# Altium PCB AP2-Core.PcbDoc (part 2 of 3)
Units mm, origin at the board's own origin, x right, y up, seen from the top; angles counter-clockwise.
Board outline 50.2 x 44.2 mm, 4 copper layers (顶层, MidLayer1, MidLayer2, 底层); 65 components, 157 nets, 448 pads, 134 vias.
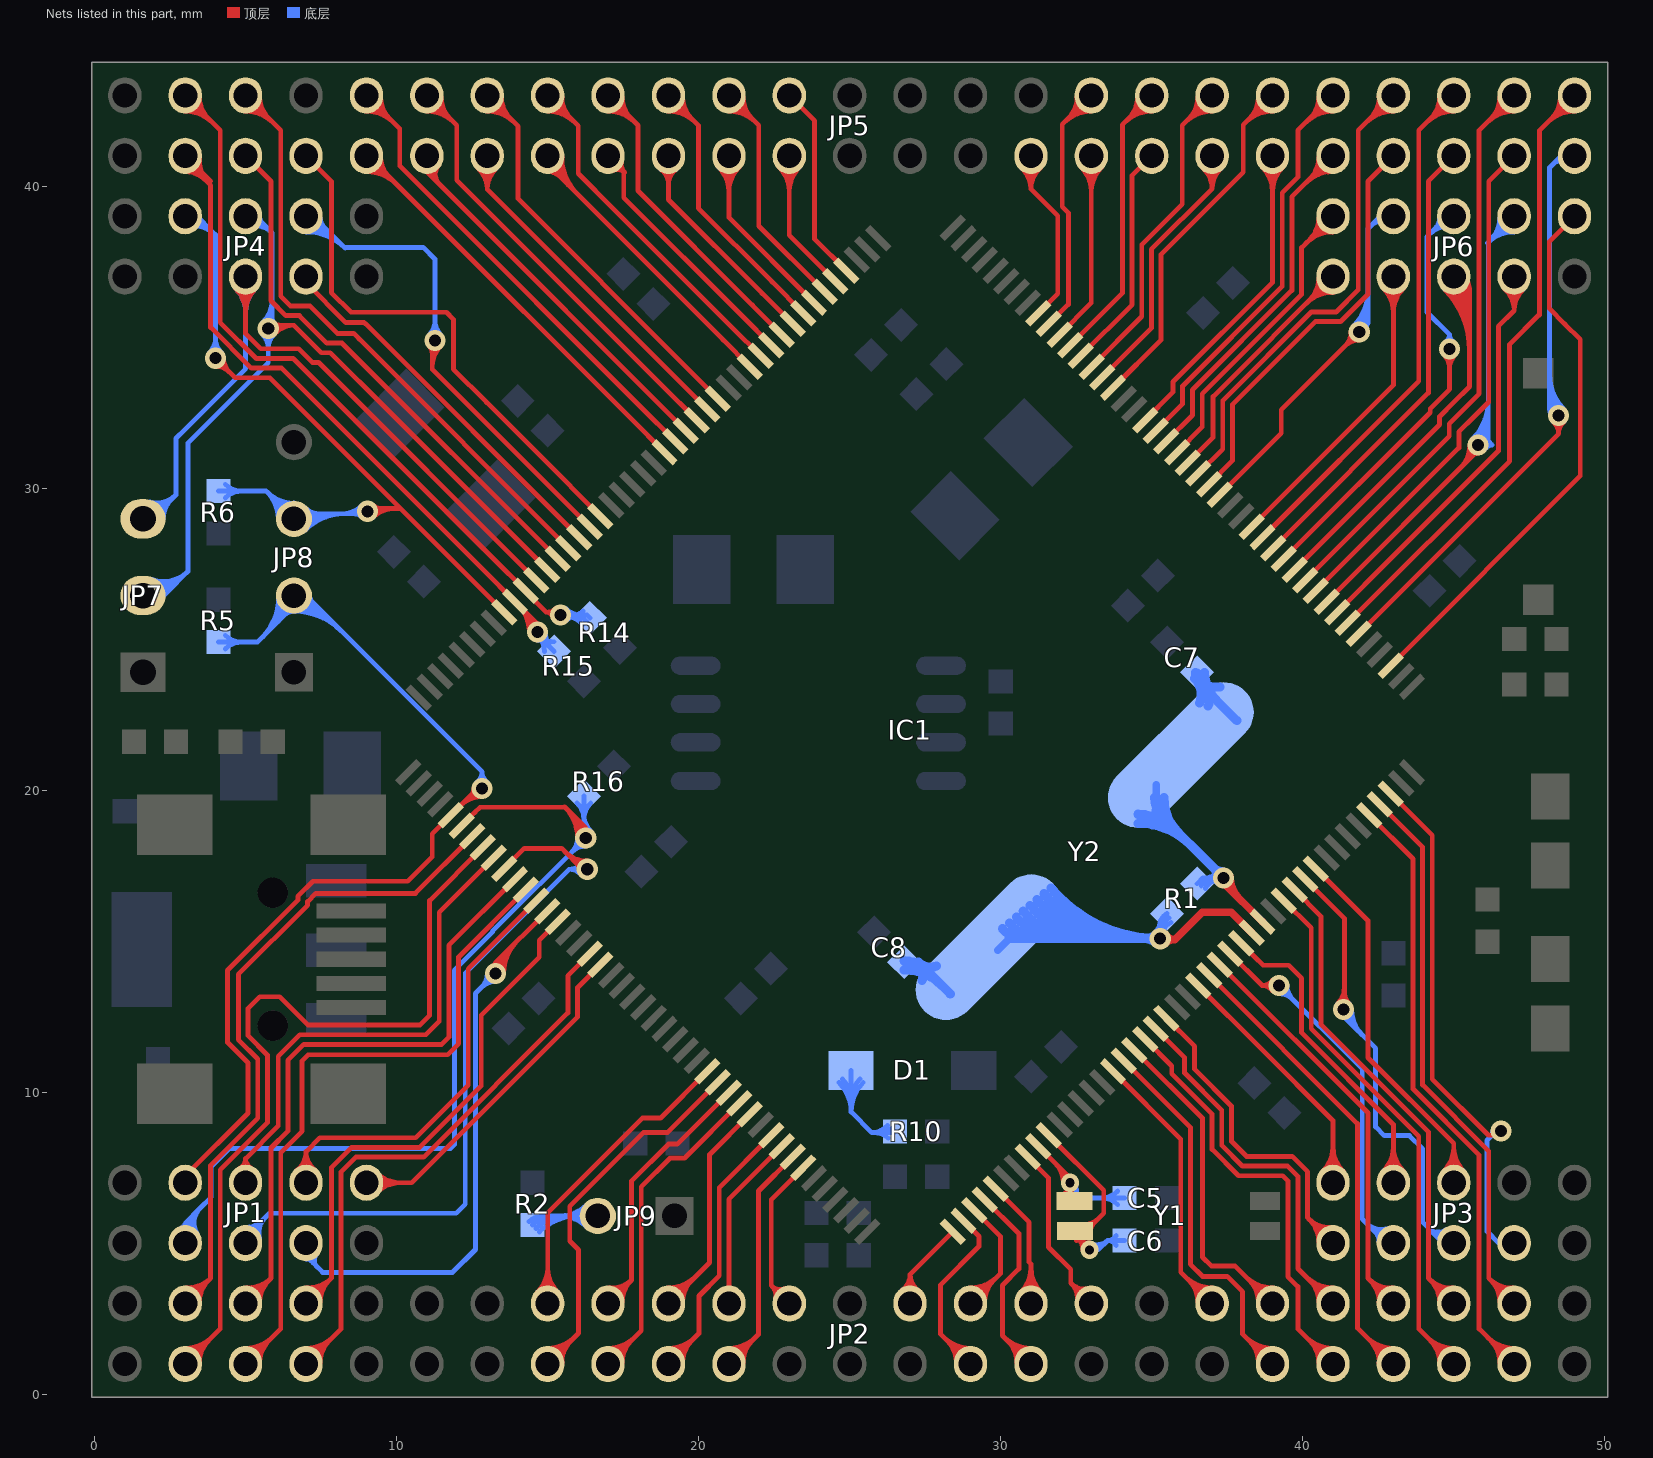
[diagram p4: the nets of this part, all layers, seen from the top]

## Via types
v1: diameter 0.7, hole 0.4, 顶层 to 底层, 90 vias
v2: diameter 0.6, hole 0.3, 顶层 to 底层, 44 vias

## Nets (pads, with @x,y where several pads share a name; then routed paths per layer and width w, separated by ;. In a path a pad name is that pad's centre, name@x,y a point inside that pad or via, vN(x,y) a via of type N, cw(c..) or ccw(c..) an arc to the next point about the centre after c; other vN are vias at no path point) (continued)
NetR2_1: JP9.2 R2.1 | length 9.4
  底层 w0.16: R2.1@14.387,5.713 cw(c14.838,5.262) R2.1@14.838,5.9 ; R2.1@14.613,5.487 cw(c15.611,4.489) 15.611,5.9 ; R2.1@14.726,5.374 cw(c15.997,4.103) 15.997,5.9 ; 15.224,5.9 ccw(c15.224,4.876) R2.1@14.5,5.6 14.8,5.9 JP9.2@16.66,5.9 ; JP9.2@16.292,5.532 ccw(c15.405,4.645) 15.405,5.9 ccw(c15.405,7.155) JP9.2@16.292,6.268 ; JP9.2@16.405,5.645 ccw(c15.791,5.031) 15.791,5.9 ccw(c15.791,6.769) JP9.2@16.405,6.155
NetR10_2: D1.2 R10.2 | length 8.3
  底层 w0.16: D1.2@24.643,10.317 cw(c23.67,9.344) 25.046,9.344 cw(c26.422,9.344) D1.2@25.449,10.317 ; D1.2@24.756,10.43 cw(c24.056,9.73) 25.046,9.73 cw(c26.036,9.73) D1.2@25.336,10.43 ; D1.2@25.046,10.72 25.046,9.344 25.73,8.66 ; 25.824,8.66 cw(c25.824,8.024) R10.2@26.274,8.474 ; 26.072,8.66 ccw(c26.072,9.057) R10.2@26.377,8.803 ; R10.2@26.254,8.905 cw(c25.73,9.343) 25.73,8.66 ; R10.2@26.5,8.7 26.46,8.66 25.73,8.66
OSC_IN: C8.1 IC1.29 R1.2 Y2.1 | length 39.4
  顶层 w0.25: v1(35.28,15.08) 35.31,15.05 35.76,15.05 ; v1@35.439,14.921 cw(c35.751,14.609) 35.751,15.05 ; v1@35.466,15.206 ccw(c35.76,15.404) 35.76,15.05 ; IC1.29@38.314,15.282 37.636,15.96 36.67,15.96 35.76,15.05
  底层 w0.16: v1@35.101,15.282 ccw(c34.748,15.68) R1.2@35.28,15.68 ; v1@35.28,15.049 cw(c35.909,15.049) R1.2@35.645,15.62 ; v1(35.28,15.08) R1.2@35.28,15.68 ; v1@35.28,15.299 cw(c35.793,15.299) R1.2@35.577,15.765 ; 35.28,15.55 cw(c35.677,15.55) R1.2@35.51,15.91 R1.2@35.28,15.68 ; v1@35.459,15.282 cw(c35.812,15.68) R1.2@35.28,15.68
  底层 w0.25: C8.1@26.8,14.3 C8.1@27.28,14.3 ; Y2.1@29.9,14.7 Y2.1@30.28,15.08
  底层 w0.3: C8.1@26.8,14.05 cw(c26.8,12.288) Y2.1@28.046,13.534 ; C8.1@26.8,14.35 cw(c26.8,13.312) Y2.1@27.534,14.046 ; C8.1@27.28,14.3 Y2.1@28.33,13.25 ; Y2.1@27.398,13.704 ccw(c26.884,13.912) 27.276,14.304 ccw(c27.673,14.702) Y2.1@27.877,14.178 ; Y2.1@30.058,15.409 ccw(c30.765,16.005) Y2.1@30.765,15.08 ; Y2.1@30.28,15.08 v1(35.28,15.08) ; Y2.1@30.288,15.602 ccw(c31.41,16.548) 31.41,15.08 ; Y2.1@30.517,15.795 ccw(c32.055,17.091) 32.055,15.08 ; Y2.1@30.747,15.989 ccw(c32.7,17.634) 32.7,15.08 ; Y2.1@30.976,16.182 ccw(c33.345,18.177) 33.345,15.08 ; Y2.1@31.205,16.375 ccw(c33.99,18.721) 33.99,15.08 ; Y2.1@31.435,16.569 ccw(c34.635,19.264) 34.635,15.08 ; Y2.1@31.664,16.762 ccw(c35.28,19.807) v1(35.28,15.08) ; v1@35.139,14.939 ccw(c34.797,14.597) 34.797,15.08 ccw(c34.797,15.563) v1@35.139,15.221
OSC_OUT: C7.1 IC1.30 R1.1 Y2.2 | length 22.1
  顶层 w0.25: v1@37.404,17.09 v1(37.38,17.09) 37.38,16.923 IC1.30@38.667,15.636 ; v1@37.605,17.09 ccw(c38.551,17.09) 37.882,16.421
  底层 w0.16: R1.1@36.5,16.9 36.69,17.09 v1(37.38,17.09) ccw(c37.38,16.396) R1.1@36.778,16.741 ; R1.1@36.639,16.82 cw(c37.104,16.554) v1@37.104,17.09 ; v1@37.189,16.899 ccw(c36.728,16.438) 36.728,17.09 ccw(c36.728,17.742) v1@37.189,17.281
  底层 w0.25: Y2.2@35.15,19.32 Y2.2@35.15,20.18 ; C7.1@36.5,23.62 C7.1@36.5,23.9
  底层 w0.3: Y2.2@34.55,18.9 cw(c34.55,16.436) 36.292,18.178 ; Y2.2@34.55,19.2 cw(c34.55,17.46) 35.78,18.69 ; Y2.2@35.1,19.75 ccw(c36.016,19.75) 35.368,19.102 ; Y2.2@35.15,19.32 v1(37.38,17.09) ; Y2.2@35.4,19.75 ccw(c37.04,19.75) 35.88,18.59 ; C7.1@36.45,23.9 ccw(c37.005,23.9) C7.1@36.613,23.507 ; C7.1@36.5,23.62 Y2.2@37.82,22.3 ; Y2.2@36.587,22.89 ccw(c35.883,23.167) 36.418,23.702 ccw(c37.122,24.405) Y2.2@37.26,23.42 ; 36.742,23.378 cw(c36.348,22.984) Y2.2@36.866,22.78 ; C7.1@36.75,23.9 ccw(c38.03,23.9) Y2.2@37.125,22.995 ; v1@37.18,17.09 ccw(c36.697,17.09) 37.039,17.431 ccw(c37.38,17.773) v1@37.38,17.29
PA0: IC1.40 JP2.48 | length 23.1
  顶层 w0.16: IC1.40@42.203,19.172 43.65,17.724 43.65,10.105 45.84,7.915 45.84,2.16 JP2.48@47,1 ; 46.112,1.888 ccw(c47,2.775) JP2.48@47,1.52 ; 46.233,1.767 cw(c45.516,1.05) JP2.48@46.53,1.05 ; 46.385,1.615 ccw(c47,2.229) JP2.48@47,1.36 ; 46.506,1.494 cw(c46.062,1.05) JP2.48@46.69,1.05
PA1: IC1.41 JP2.47 | length 21.1
  顶层 w0.16: IC1.41@42.556,19.525 43.97,18.111 43.97,10.238 46.16,8.048 46.16,3.84 JP2.47@47,3 ; 46.185,3.815 ccw(c46.905,4.534) JP2.47@46.97,3.519 ; 46.233,3.767 cw(c45.516,3.05) JP2.47@46.53,3.05 ; 46.435,3.565 ccw(c46.935,4.064) JP2.47@46.98,3.359 ; 46.506,3.494 cw(c46.062,3.05) JP2.47@46.69,3.05
PA2: IC1.42 JP3.8 | length 18.6
  顶层 w0.16: IC1.42@42.91,19.879 44.29,18.499 44.29,10.43 46.15,8.57 46.42,8.57 v1(46.56,8.71)
  底层 w0.16: 46.205,8.505 ccw(c46,8.71) v1@46.29,8.71 ; 46.221,8.521 cw(c46.448,8.294) v1@46.531,8.604 ; v1(46.56,8.71) 46.41,8.71 46.1,8.4 46.1,5.39 46.49,5 JP3.8@47,5 ; JP3.8@46.78,5.23 JP3.8@47.06,5.23
PA3: IC1.47 JP6.9 | length 18.3
  顶层 w0.16: IC1.47@42.91,24.121 49.19,30.401 49.19,34.92 48.68,35.43 48.16,35.95 48.16,38.16 JP6.9@49,39
PA4: IC1.50 JP5.50 | length 25
  顶层 w0.16: IC1.50@41.849,25.182 48.47,31.803 ; v1@48.292,32.197 cw(c47.944,31.803) 48.47,31.803 ; v1(48.47,32.4) 48.47,31.803 ; v1@48.648,32.197 ccw(c48.996,31.803) 48.47,31.803
  底层 w0.16: 48.17,32.617 ccw(c48.687,32.617) v1@48.322,32.252 ; 48.17,33.004 ccw(c49.074,33.004) v1@48.435,32.365 ; 48.17,33.39 ccw(c49.46,33.39) v1@48.548,32.478 ; 48.17,33.776 ccw(c49.846,33.776) v1@48.661,32.591 ; 48.25,40.69 cw(c48.683,40.258) JP5.50@48.937,40.814 ; 48.413,40.853 cw(c48.785,40.481) JP5.50@49.004,40.959 ; v1(48.47,32.4) 48.4,32.4 48.21,32.59 48.17,32.63 48.17,40.61 48.56,41 JP5.50@49,41
PA5: IC1.51 JP5.49 | length 23.5
  顶层 w0.16: IC1.51@41.496,25.536 46.85,30.89 46.85,34.76 47.82,35.73 47.84,35.73 47.84,41.84 JP5.49@49,43 ; 48.112,42.112 cw(c49,41.225) JP5.49@49,42.48 ; 48.233,42.233 ccw(c47.516,42.95) JP5.49@48.53,42.95 ; 48.385,42.385 cw(c49,41.771) JP5.49@49,42.64 ; 48.506,42.506 ccw(c48.062,42.95) JP5.49@48.69,42.95
PA6: IC1.52 JP6.8 | length 16.5
  顶层 w0.16: IC1.52@41.142,25.889 42.92,27.667 46.48,31.227 46.48,32.46 ; 46.48,32.16 46.48,35.36 47,35.88 ; JP6.8@46.682,36.604 cw(c46.017,35.88) 47,35.88 ; JP6.8@46.79,36.722 cw(c46.352,36.244) 47,36.244 cw(c47.648,36.244) JP6.8@47.21,36.722 ; JP6.8@47,37 47,35.88 ; JP6.8@47.318,36.604 ccw(c47.983,35.88) 47,35.88
PA7: IC1.53 JP6.7 | length 25.6
  顶层 w0.16: IC1.53@40.789,26.243 45.806,31.26 v1(45.806,31.424) ; 45.229,30.683 ccw(c44.488,31.424) v1@45.536,31.424 ; 45.502,30.956 ccw(c45.034,31.424) v1@45.696,31.424 ; 45.625,31.079 cw(c45.806,30.898) v1@45.806,31.154
  底层 w0.16: v1@45.615,31.615 ccw(c44.348,32.882) 46.14,32.882 ; v1@45.672,31.586 cw(c45.891,31.321) 46.134,31.564 ; v1@45.728,31.502 ccw(c44.734,32.496) 46.14,32.496 ; v1@45.774,31.463 cw(c46.004,31.184) 46.259,31.439 ; v1(45.806,31.424) 46.274,31.424 ; v1@45.841,31.389 ccw(c45.12,32.11) 46.14,32.11 ; v1@45.954,31.276 ccw(c45.506,31.724) 46.14,31.724 ; v1@46.04,31.289 cw(c46.274,31.153) 46.274,31.424 ; v1@46.04,31.559 ccw(c46.274,31.695) 46.274,31.424 ; 46.115,38.115 cw(c46.996,37.234) JP6.7@46.999,38.48 ; 46.233,38.233 ccw(c45.516,38.95) JP6.7@46.53,38.95 ; 46.387,38.387 cw(c46.997,37.777) JP6.7@46.999,38.64 ; 46.506,38.506 ccw(c46.062,38.95) JP6.7@46.69,38.95 ; JP6.7@47,39 46.14,38.14 46.14,31.558 46.274,31.424
PA8: IC1.119 JP5.6 | length 18.2
  顶层 w0.16: JP5.6@5,41 5.84,40.16 5.84,36.2 6.33,35.71 6.78,35.71 7.69,34.8 8.19,34.8 8.37,34.62 IC1.119@15.333,27.657
PA9: IC1.120 JP4.5 JP7.2 | length 39
  顶层 w0.16: v1@5.73,35.53 5.87,35.39 6.6,35.39 ; v1@5.832,35.207 cw(c6.242,34.84) 6.242,35.39 ; v1@5.941,35.471 ccw(c6.136,35.666) 6.136,35.39 ; v1@5.951,35.1 cw(c6.6,34.519) 6.6,35.39 ; IC1.120@14.979,27.303 9.68,32.602 7.802,34.48 7.51,34.48 6.6,35.39
  底层 w0.16: JP7.2@1.6,26.44 2.29,26.44 3.09,27.24 ; JP7.2@1.676,26.374 ccw(c1.906,27.004) 2.38,26.53 ; JP7.2@1.731,26.525 ccw(c2.001,27.264) 2.558,26.708 ; JP7.2@1.786,26.675 ccw(c2.096,27.525) 2.735,26.885 ; JP7.2@1.84,26.825 ccw(c2.19,27.785) 2.912,27.062 ; JP7.2@1.895,26.976 ccw(c2.285,28.045) 3.09,27.24 ; JP4.5@5,39 5.33,39 5.88,38.45 v1@5.88,35.41 ; JP4.5@5.042,38.806 cw(c5.227,38.179) 5.689,38.641 ; JP4.5@5.087,38.653 cw(c5.313,37.885) 5.879,38.451 ; JP4.5@5.47,38.95 ccw(c5.687,38.95) 5.534,38.796 ; v1@5.559,35.089 cw(c5.098,34.628) 5.75,34.628 cw(c6.402,34.628) v1@5.941,35.089 ; v1@5.559,35.471 ccw(c4.784,36.246) 5.88,36.246 ; v1@5.672,35.358 ccw(c5.171,35.859) 5.88,35.859 ; 5.88,35.618 ccw(c6.088,35.618) v1@5.941,35.471 ; 3.09,27.24 3.09,31.49 5.75,34.15 v1(5.75,35.28) ; v1(5.75,35.28) v1@5.88,35.41 ; v1(5.75,35.28) v1@5.88,35.41
PA10: IC1.121 JP4.6 JP7.3 | length 33.7
  顶层 w0.16: JP4.6@4.669,36.617 cw(c3.877,35.82) 5,35.82 ; JP4.6@4.781,36.73 cw(c4.259,36.205) 5,36.205 cw(c5.741,36.205) JP4.6@5.219,36.73 ; JP4.6@5,37 5,35.82 ; JP4.6@5.331,36.617 ccw(c6.123,35.82) 5,35.82 ; IC1.121@14.626,26.95 7.435,34.14 7.415,34.16 7.21,34.16 6.76,34.61 5.5,34.61 5,35.11 5,35.82
  底层 w0.16: JP7.3@1.6,28.98 1.9,28.98 2.69,29.77 ; JP7.3@1.76,29.223 ccw(c1.895,29.764) 2.29,29.37 ; JP7.3@1.799,29.378 ccw(c1.975,30.085) 2.49,29.57 ; JP7.3@1.837,29.533 ccw(c2.054,30.406) 2.69,29.77 ; JP7.3@2.11,28.98 cw(c2.617,28.98) 2.258,29.338 ; JP7.3@2.27,28.98 cw(c3.163,28.98) 2.532,29.612 ; JP4.6@4.668,36.618 cw(c3.865,35.815) 5,35.815 cw(c6.135,35.815) JP4.6@5.332,36.618 ; JP4.6@4.781,36.731 cw(c4.252,36.202) 5,36.202 cw(c5.748,36.202) JP4.6@5.219,36.731 ; JP4.6@5,37 5,33.95 3,31.95 2.69,31.64 2.69,29.77
PA11: IC1.122 JP5.3 R14.1 | length 30.9
  顶层 w0.16: JP5.3@3,42.48 cw(c3,41.225) 3.888,42.112 ; JP5.3@3,42.64 cw(c3,41.771) 3.615,42.385 ; JP5.3@3,43 4.16,41.84 4.16,37.2 4.16,35.48 5.35,34.29 6.578,34.29 13.2,27.668 IC1.122@14.272,26.596 14.272,26.568 14.95,25.89 ; JP5.3@3.31,42.95 ccw(c3.938,42.95) 3.494,42.506 ; JP5.3@3.47,42.95 ccw(c4.484,42.95) 3.767,42.233 ; IC1.122@14.582,26.331 ccw(c14.759,26.331) 14.634,26.206 ; 14.995,25.89 ccw(c14.995,26.235) v1@15.239,25.991 ; v1@15.171,25.724 ccw(c14.95,25.66) 14.95,25.89 ; v1(15.43,25.8) 15.52,25.89 14.95,25.89
  底层 w0.16: v1@15.621,25.609 cw(c16.082,25.148) 16.082,25.8 cw(c16.082,26.452) v1@15.621,25.991 ; 15.8,25.8 cw(c15.8,25.137) R14.1@16.283,25.591 ; 15.869,25.8 ccw(c15.869,26.231) R14.1@16.174,25.926 ; R14.1@16.167,25.481 ccw(c15.43,24.79) v1(15.43,25.8) 16.3,25.8 R14.1@16.4,25.7
PA12: IC1.123 JP5.4 R15.2 | length 30.8
  顶层 w0.16: JP5.4@2.8,41.06 3.84,40.02 3.84,36.38 3.84,35.32 5.19,33.97 6.191,33.97 12.88,27.281 IC1.123@13.919,26.243 14.66,25.501 v1(14.66,25.24) ; JP5.4@3,40.48 cw(c3,39.563) 3.649,40.211 ; JP5.4@3,40.64 cw(c3,40.109) 3.376,40.484 ; JP5.4@3,41 3.84,40.16 ; JP5.4@3.309,40.932 ccw(c4.111,40.884) 3.543,40.317 ; JP5.4@3.469,40.922 ccw(c4.586,40.856) 3.795,40.065 ; IC1.123@14.014,26.147 cw(c13.108,25.24) v1@14.39,25.24 ; 14.288,25.874 cw(c13.654,25.24) v1@14.55,25.24 ; 14.561,25.6 cw(c14.2,25.24) v1@14.71,25.24
  底层 w0.16: v1@14.66,24.97 cw(c14.66,24.56) R15.2@14.95,24.85 ; v1(14.66,25.24) 14.66,25.14 R15.2@15.21,24.59 ; v1@14.77,25.236 ccw(c15.221,25.217) 14.902,24.898 ; R15.2@14.89,24.59 ccw(c14.117,24.59) 14.664,25.136 ccw(c15.21,25.682) R15.2@15.21,24.91 ; v1@14.93,25.229 ccw(c15.717,25.197) R15.2@15.16,24.64
PA13: IC1.124 JP4.3 JP8.3 R6.2 | length 41.2
  顶层 w0.16: v1@4,34.03 cw(c4,33.378) 4.461,33.839 cw(c4.922,34.3) v1@4.27,34.3 ; v1(4,34.3) 4.65,33.65 5.804,33.65 IC1.124@13.565,25.889 ; v1@9.1,29.15 9.269,29.319 10.135,29.319 ; v1@9.118,29.152 cw(c9.521,28.749) 9.521,29.319 ; v1@9.231,29.039 cw(c9.907,28.363) 9.907,29.319 ; v1@9.231,29.421 ccw(c9.477,29.667) 9.477,29.319
  底层 w0.16: JP4.3@2.74,39.11 3.28,39.11 4,38.39 v1(4,34.3) ; JP4.3@2.998,38.96 cw(c3.143,38.322) 3.605,38.785 ; JP4.3@3.033,38.804 cw(c3.219,37.988) 3.81,38.58 ; JP4.3@3.069,38.648 cw(c3.295,37.655) 4.015,38.375 ; v1@3.809,34.491 ccw(c3.348,34.952) 4,34.952 ccw(c4.652,34.952) v1@4.191,34.491 ; R6.2@4.1,29.9 5.68,29.9 JP8.3@6.6,28.98 6.77,29.15 v1@9.1,29.15 ; R6.2@4.326,29.674 cw(c4.873,29.127) 4.873,29.9 cw(c4.873,30.673) R6.2@4.326,30.126 ; JP8.3@6.08,28.98 ccw(c4.825,28.98) 5.712,29.868 ccw(c6.6,30.755) JP8.3@6.6,29.5 ; JP8.3@6.24,28.98 ccw(c5.371,28.98) 5.985,29.595 ccw(c6.6,30.209) JP8.3@6.6,29.34 ; JP8.3@6.741,28.839 cw(c7.493,28.087) 7.493,29.15 ; JP8.3@6.855,28.725 cw(c7.88,27.7) 7.88,29.15 ; JP8.3@6.968,28.612 cw(c8.266,27.314) 8.266,29.15 ; JP8.3@6.968,29.348 ccw(c7.445,29.825) 7.445,29.15 ; 8.195,29.15 ccw(c8.195,30.075) v1@8.849,29.421 ; v1@8.849,29.039 ccw(c8.581,28.771) 8.581,29.15 ccw(c8.581,29.689) v1@8.962,29.308
  other v1: 9.04,29.23
PA14: IC1.137 JP1.3 JP8.2 R5.2 | length 45.8
  顶层 w0.16: JP1.3@3,7 3,7.23 5.08,9.31 5.08,10.965 4.4,11.645 4.4,13.29 4.4,14.03 6.73,16.36 6.73,16.48 7.23,16.98 10.37,16.98 11.18,17.79 11.18,18.554 IC1.137@11.797,19.172 12.676,20.05 v1(12.83,20.05) ; IC1.137@12.106,19.48 cw(c12.83,18.755) v1@12.83,19.78 ; 12.379,19.753 cw(c12.83,19.302) v1@12.83,19.94 ; 12.478,19.853 ccw(c12.281,20.05) v1@12.56,20.05
  底层 w0.16: R5.2@4.1,24.9 5.39,24.9 6.6,26.11 JP8.2@6.6,26.44 7,26.44 10.83,22.61 12.83,20.61 ; R5.2@4.326,24.674 cw(c4.873,24.127) 4.873,24.9 cw(c4.873,25.673) R5.2@4.326,25.126 ; 5.555,25.065 ccw(c4.282,26.338) JP8.2@6.081,26.417 ; 5.812,25.322 ccw(c4.775,26.36) JP8.2@6.24,26.424 ; 6.069,25.579 ccw(c5.267,26.381) JP8.2@6.4,26.431 ; 6.276,25.786 cw(c6.6,25.461) 6.6,25.92 cw(c6.6,23.699) 8.171,25.269 ; 6.326,25.836 ccw(c5.759,26.403) JP8.2@6.56,26.438 ; JP8.2@6.6,26.08 cw(c6.6,24.245) 7.897,25.543 ; JP8.2@6.6,26.24 cw(c6.6,24.791) 7.624,25.816 ; JP8.2@6.6,26.4 cw(c6.6,25.338) 7.351,26.089 ; JP8.2@7.12,26.44 ccw(c7.41,26.44) 7.205,26.235 ; v1@12.662,20.261 ccw(c12.384,20.61) 12.83,20.61 ; v1(12.83,20.05) 12.83,20.61 ; v1@12.998,20.261 cw(c13.276,20.61) 12.83,20.61
PA15: IC1.138 JP1.4 R16.1 | length 39.7
  顶层 w0.16: IC1.138@12.151,18.821 IC1.138@12.151,18.818 12.593,19.26 12.763,19.43 15.58,19.43 16.26,18.75 v1(16.26,18.41) v1@16.12,18.41 ; 15.559,19.451 cw(c14.517,18.41) v1@15.99,18.41 ; 15.832,19.178 cw(c15.064,18.41) v1@16.15,18.41 ; 16.105,18.905 cw(c15.61,18.41) v1@16.31,18.41
  底层 w0.16: JP1.4@2.88,5.504 ccw(c2.839,5.66) 3,5.66 ; JP1.4@2.992,5.045 cw(c3.454,5.339) 3.067,5.727 ; JP1.4@3,5 3,5.66 ; JP1.4@3.12,5.504 cw(c3.161,5.66) 3,5.66 ; JP1.4@3.127,5.13 cw(c3.627,5.448) 3.208,5.868 ; JP1.4@3.262,5.216 cw(c3.8,5.558) 3.349,6.009 ; JP1.4@3.397,5.302 cw(c3.972,5.668) 3.49,6.15 ; R16.1@15.974,19.574 cw(c15.427,19.027) 16.2,19.027 cw(c16.973,19.027) R16.1@16.426,19.574 ; v1@15.99,18.41 cw(c15.338,18.41) 15.799,17.949 cw(c16.26,17.488) v1@16.26,18.14 ; v1@16.069,18.601 ccw(c15.753,18.917) 16.2,18.917 ; 16.2,18.82 ccw(c16.67,18.82) v1@16.338,18.488 ; 16.2,19.207 ccw(c17.057,19.207) v1@16.451,18.601 ; R16.1@16.2,19.8 16.2,18.47 v1(16.26,18.41) 13.17,15.32 13.17,15.293 11.91,14.033 11.91,8.26 11.78,8.13 4.46,8.13 3.86,7.53 3.86,6.52 3.49,6.15 ; 3,5.66 3.49,6.15
PB0: IC1.56 JP6.6 | length 21.9
  顶层 w0.16: IC1.56@39.728,27.303 44.53,32.105 44.53,32.37 45,32.84 45.52,33.36 45.52,36.61 45.13,37 JP6.6@45,37 ; JP6.6@44.668,36.618 cw(c42.61,34.56) 45.52,34.56 ; JP6.6@44.781,36.731 cw(c42.996,34.946) 45.52,34.946 ; JP6.6@44.894,36.844 cw(c43.382,35.332) 45.52,35.332 ; JP6.6@45.007,36.957 cw(c43.769,35.719) 45.52,35.719 ; JP6.6@45.12,37.07 cw(c44.155,36.105) 45.52,36.105 ; JP6.6@45.17,36.691 cw(c45.301,36.49) 45.471,36.659 ; JP6.6@45.233,37.183 cw(c44.541,36.491) 45.52,36.491
PB1: IC1.57 JP6.5 | length 17.8
  顶层 w0.16: IC1.57@39.374,27.657 44.22,32.502 44.22,32.63 44.86,33.27 v1(44.86,34.61) ; v1@44.669,34.419 cw(c44.208,33.958) 44.86,33.958 cw(c45.512,33.958) v1@45.051,34.419
  底层 w0.16: 44.198,38.408 cw(c44.8,37.805) JP6.5@44.947,38.645 ; 44.382,38.592 ccw(c44.023,38.95) JP6.5@44.53,38.95 ; 44.416,38.626 cw(c44.865,38.176) JP6.5@44.974,38.802 ; v1@44.724,34.843 ccw(c44.586,35.08) 44.86,35.08 ; v1(44.86,34.61) 44.86,35.08 ; v1@44.996,34.843 cw(c45.134,35.08) 44.86,35.08 ; JP6.5@45,39 44.79,39 44.11,38.32 44.11,35.83 44.86,35.08
PB2: IC1.58 JP5.46 | length 15.5
  顶层 w0.16: IC1.58@39.021,28.01 44.16,33.15 44.16,40.16 JP5.46@45,41
PB3: IC1.161 JP2.15 | length 13.2
  顶层 w0.16: JP2.15@14.668,3.382 ccw(c13.865,4.185) 15,4.185 ccw(c16.135,4.185) JP2.15@15.332,3.382 ; JP2.15@14.781,3.269 ccw(c14.252,3.798) 15,3.798 ccw(c15.748,3.798) JP2.15@15.219,3.269 ; JP2.15@15,3 15,6.01 18.13,9.14 18.736,9.14 IC1.161@20.282,10.686
PB4: IC1.162 JP2.16 | length 15.3
  顶层 w0.16: JP2.16@15,1 16.02,2.02 16.02,4.78 15.73,5.07 15.73,6.22 18.17,8.66 18.963,8.66 IC1.162@20.636,10.333 ; JP2.16@15,1.36 ccw(c15,2.229) 15.615,1.615 ; JP2.16@15,1.52 ccw(c15,2.775) 15.888,1.888 ; JP2.16@15.31,1.05 cw(c15.938,1.05) 15.494,1.494 ; JP2.16@15.47,1.05 cw(c16.484,1.05) 15.767,1.767
PB5: IC1.163 JP2.17 | length 11.5
  顶层 w0.16: JP2.17@17,3 17.78,3.78 ; JP2.17@17.031,3.358 ccw(c17.093,3.989) 17.541,3.541 ; JP2.17@17.046,3.518 ccw(c17.136,4.424) 17.78,3.78 ; JP2.17@17.31,3.05 cw(c17.938,3.05) 17.494,3.494 ; JP2.17@17.47,3.05 cw(c18.484,3.05) 17.767,3.767 ; IC1.163@20.99,9.979 19.29,8.28 19,8.28 17.78,7.06 17.78,3.78
PB6: IC1.164 JP2.18 | length 13.7
  顶层 w0.16: JP2.18@17,1 18.1,2.1 18.1,6.86 19.06,7.82 19.538,7.82 IC1.164@21.343,9.626 ; JP2.18@17,1.36 ccw(c17,2.229) 17.615,1.615 ; JP2.18@17,1.52 ccw(c17,2.775) 17.888,1.888 ; JP2.18@17.31,1.05 cw(c17.938,1.05) 17.494,1.494 ; JP2.18@17.47,1.05 cw(c18.484,1.05) 17.767,1.767
PB7: IC1.165 JP2.19 | length 10.3
  顶层 w0.16: JP2.19@19,3 20.36,4.36 20.36,7.935 IC1.165@21.697,9.272 ; JP2.19@19,3.36 ccw(c19,4.229) 19.615,3.615 ; JP2.19@19,3.52 ccw(c19,4.775) 19.888,3.888 ; JP2.19@19.31,3.05 cw(c19.938,3.05) 19.494,3.494 ; JP2.19@19.47,3.05 cw(c20.484,3.05) 19.767,3.767
PB8: IC1.167 JP2.20 | length 11.9
  顶层 w0.16: JP2.20@19,1 20.01,2.01 20.01,3.25 20.68,3.92 20.68,6.841 IC1.167@22.404,8.565 ; JP2.20@19,1.36 ccw(c19,2.229) 19.615,1.615 ; JP2.20@19,1.52 ccw(c19,2.775) 19.888,1.888 ; JP2.20@19.31,1.05 cw(c19.938,1.05) 19.494,1.494 ; JP2.20@19.47,1.05 cw(c20.484,1.05) 19.767,1.767
PB9: IC1.168 JP2.21 | length 5.9
  顶层 w0.16: JP2.21@21,3 21,6.454 IC1.168@22.757,8.211
PB10: IC1.79 JP5.33 | length 11.3
  顶层 w0.16: IC1.79@31.596,35.435 32.24,36.079 32.24,39.118 32.04,39.318 32.04,42.04 JP5.33@33,43 ; 32.112,42.112 cw(c33,41.225) JP5.33@33,42.48 ; 32.233,42.233 ccw(c31.516,42.95) JP5.33@32.53,42.95 ; 32.385,42.385 cw(c33,41.771) JP5.33@33,42.64 ; 32.506,42.506 ccw(c32.062,42.95) JP5.33@32.69,42.95
PB11: IC1.80 JP5.32 | length 8.4
  顶层 w0.16: JP5.32@30.688,40.598 cw(c30.074,39.905) 31,39.905 ; JP5.32@30.794,40.718 cw(c30.389,40.261) 31,40.261 cw(c31.611,40.261) JP5.32@31.206,40.718 ; JP5.32@31,41 31,39.905 ; IC1.80@31.243,35.789 31.89,36.436 31.89,39.015 31,39.905 ; JP5.32@31.312,40.598 ccw(c31.926,39.905) 31,39.905
PB12: IC1.92 JP5.23 | length 6.6
  顶层 w0.16: JP5.23@23,43 23.84,42.16 23.84,38.241 IC1.92@24.879,37.203
PB13: IC1.93 JP5.24 | length 7.7
  顶层 w0.16: JP5.24@22.668,40.618 cw(c21.865,39.815) 23,39.815 cw(c24.135,39.815) JP5.24@23.332,40.618 ; JP5.24@22.781,40.731 cw(c22.252,40.202) 23,40.202 cw(c23.748,40.202) JP5.24@23.219,40.731 ; JP5.24@23,41 23,38.374 IC1.93@24.525,36.849
PB14: IC1.94 JP5.21 | length 10.8
  顶层 w0.16: JP5.21@21,42.48 cw(c21,41.225) 21.888,42.112 ; JP5.21@21,42.64 cw(c21,41.771) 21.615,42.385 ; JP5.21@21,43 21.99,42.01 21.99,38.677 IC1.94@24.172,36.496 ; JP5.21@21.31,42.95 ccw(c21.938,42.95) 21.494,42.506 ; JP5.21@21.47,42.95 ccw(c22.484,42.95) 21.767,42.233
PB15: IC1.95 JP5.22 | length 9
  顶层 w0.16: JP5.22@20.668,40.618 cw(c19.865,39.815) 21,39.815 cw(c22.135,39.815) JP5.22@21.332,40.618 ; JP5.22@20.781,40.731 cw(c20.252,40.202) 21,40.202 cw(c21.748,40.202) JP5.22@21.219,40.731 ; JP5.22@21,41 21,38.96 IC1.95@23.818,36.142
PC0: IC1.32 JP2.46 | length 20.6
  顶层 w0.16: IC1.32@39.374,16.343 40.28,15.438 40.28,12.1 43.84,8.54 43.84,2.16 JP2.46@45,1 ; 44.112,1.888 ccw(c45,2.775) JP2.46@45,1.52 ; 44.233,1.767 cw(c43.516,1.05) JP2.46@44.53,1.05 ; 44.385,1.615 ccw(c45,2.229) JP2.46@45,1.36 ; 44.506,1.494 cw(c44.062,1.05) JP2.46@44.69,1.05
PC1: IC1.33 JP2.45 | length 18.6
  顶层 w0.16: IC1.33@39.728,16.697 40.6,15.825 40.6,12.25 44.16,8.69 44.16,3.84 JP2.45@45,3 ; 44.185,3.815 ccw(c44.905,4.534) JP2.45@44.97,3.519 ; 44.233,3.767 cw(c43.516,3.05) JP2.45@44.53,3.05 ; 44.435,3.565 ccw(c44.935,4.064) JP2.45@44.98,3.359 ; 44.506,3.494 cw(c44.062,3.05) JP2.45@44.69,3.05
PC2: IC1.34 JP3.6 | length 19.1
  顶层 w0.16: IC1.34@40.081,17.05 41.14,15.992 41.38,15.752 41.38,12.77 v1(41.35,12.74) ; v1@41.159,12.931 ccw(c40.626,13.464) 41.38,13.464 ; 41.38,13.319 ccw(c41.929,13.319) v1@41.541,12.931
  底层 w0.16: v1(41.35,12.74) 41.35,12.51 42.41,11.45 42.41,8.85 42.7,8.56 43.53,8.56 43.97,8.12 43.97,5.69 44.66,5 JP3.6@45,5 ; v1@41.46,12.74 ccw(c42.281,12.74) 41.7,12.16 ; v1@41.62,12.74 ccw(c42.827,12.74) 41.974,11.886 ; 44.165,5.495 ccw(c44.485,5.815) JP3.6@44.737,5.44 ; 44.302,5.358 ccw(c44.595,5.651) JP3.6@44.827,5.307 ; 44.44,5.22 ccw(c44.706,5.487) JP3.6@44.916,5.174
PC3: IC1.35 JP3.5 | length 15.3
  顶层 w0.16: IC1.35@40.435,17.404 42.16,15.679 42.16,11.143 45,8.303 JP3.5@45,7 ; JP3.5@44.668,7.382 ccw(c43.865,8.185) 45,8.185 ccw(c46.135,8.185) JP3.5@45.332,7.382 ; JP3.5@44.781,7.269 ccw(c44.252,7.798) 45,7.798 ccw(c45.748,7.798) JP3.5@45.219,7.269
PC4: IC1.54 JP5.48 | length 17.1
  顶层 w0.16: IC1.54@40.435,26.596 45.17,31.331 45.17,31.86 45.68,32.37 46.16,32.85 46.16,40.16 JP5.48@47,41
PC5: IC1.55 JP5.47 | length 21.9
  顶层 w0.16: IC1.55@40.081,26.95 44.85,31.718 44.85,32.13 45.84,33.12 45.84,41.84 JP5.47@47,43 ; 46.112,42.112 cw(c47,41.225) JP5.47@47,42.48 ; 46.233,42.233 ccw(c45.516,42.95) JP5.47@46.53,42.95 ; 46.385,42.385 cw(c47,41.771) JP5.47@47,42.64 ; 46.506,42.506 ccw(c46.062,42.95) JP5.47@46.69,42.95
PC6: IC1.115 JP5.8 | length 17.8
  顶层 w0.16: JP5.8@7,41 7.84,40.16 7.84,36.47 8.49,35.82 9.54,35.82 9.998,35.82 11.65,35.82 11.878,35.592 11.878,35.522 11.878,33.94 12.98,32.838 14.788,31.03 IC1.115@16.747,29.071
PC7: IC1.116 JP4.7 | length 22.2
  顶层 w0.16: v1@11.079,34.699 cw(c10.835,34.455) 11.18,34.455 ; 11.18,34.021 cw(c12.139,34.021) v1@11.461,34.699 ; 11.18,34.407 cw(c11.753,34.407) v1@11.348,34.812 ; v1(11.27,34.89) 11.18,34.8 11.18,33.931 12.32,32.791 IC1.116@16.393,28.718
  底层 w0.16: JP4.7@7,38.48 cw(c7,36.645) 8.297,37.943 ; JP4.7@7,38.64 cw(c7,37.191) 8.024,38.216 ; JP4.7@7,38.8 cw(c7,37.738) 7.751,38.489 ; JP4.7@7,39 7.24,39 8.27,37.97 10.88,37.97 11.27,37.58 v1(11.27,34.89) ; JP4.7@7.47,38.95 ccw(c7.905,38.95) 7.597,38.643 ; v1@11.079,35.081 ccw(c10.618,35.542) 11.27,35.542 ccw(c11.922,35.542) v1@11.461,35.081
PC8: IC1.117 JP4.8 | length 12.7
  顶层 w0.16: JP4.8@7,37 7,36.8 8.32,35.48 8.924,35.48 8.954,35.45 IC1.117@16.04,28.364
PC9: IC1.118 JP5.5 | length 23.1
  顶层 w0.16: JP5.5@5,42.48 cw(c5,41.225) 5.888,42.112 ; JP5.5@5,42.64 cw(c5,41.771) 5.615,42.385 ; JP5.5@5,43 6.16,41.84 6.16,36.35 6.48,36.03 7.13,36.03 8.04,35.12 8.577,35.12 8.757,34.94 IC1.118@15.686,28.01 ; JP5.5@5.31,42.95 ccw(c5.938,42.95) 5.494,42.506 ; JP5.5@5.47,42.95 ccw(c6.484,42.95) 5.767,42.233
PC10: IC1.139 JP2.3 | length 24.7
  顶层 w0.16: JP2.3@3,3 3.84,3.84 ; JP2.3@3.013,3.36 ccw(c3.044,4.12) 3.582,3.582 ; JP2.3@3.019,3.52 ccw(c3.064,4.616) 3.84,3.84 ; JP2.3@3.31,3.05 cw(c3.938,3.05) 3.494,3.494 ; JP2.3@3.47,3.05 cw(c4.484,3.05) 3.767,3.767 ; IC1.139@12.504,18.464 10.62,16.58 7.32,16.58 7.05,16.31 7.05,16.19 4.76,13.9 4.76,12.92 4.76,11.737 5.4,11.097 5.4,9.14 3.84,7.58 3.84,3.84
PC11: IC1.140 JP2.4 | length 29.1
  顶层 w0.16: JP2.4@3,1 4.16,2.16 4.16,7.43 5.72,8.99 5.72,11.23 5.08,11.87 5.08,12.77 5.47,13.16 6.13,13.16 7.07,12.22 10.77,12.22 11.09,12.54 11.09,16.343 IC1.140@12.858,18.111 ; JP2.4@3,1.36 ccw(c3,2.229) 3.615,1.615 ; JP2.4@3,1.52 ccw(c3,2.775) 3.888,1.888 ; JP2.4@3.31,1.05 cw(c3.938,1.05) 3.494,1.494 ; JP2.4@3.47,1.05 cw(c4.484,1.05) 3.767,1.767
PC12: IC1.141 JP1.5 | length 17.4
  顶层 w0.16: JP1.5@4.795,7.473 ccw(c4.637,7.8) 5,7.8 ; JP1.5@5,7 5,7.8 ; JP1.5@5.205,7.473 cw(c5.363,7.8) 5,7.8 ; IC1.141@13.211,17.757 11.41,15.956 11.41,12.34 10.97,11.9 6.79,11.9 6.08,11.19 6.08,8.88 5,7.8
PC13: IC1.8 JP2.33 | length 7.7
  顶层 w0.16: IC1.8@30.889,7.858 31.58,7.167 31.58,4.873 32.32,4.133 32.32,3.68 JP2.33@33,3 ; JP2.33@32.534,3.107 ccw(c31.878,3.188) 32.345,3.655 ccw(c32.747,4.057) JP2.33@32.885,3.506 ; 32.544,3.456 ccw(c32.827,3.738) JP2.33@32.924,3.351 ; 32.577,3.423 cw(c32.291,3.137) JP2.33@32.692,3.088
PC14: C5.2 IC1.9 Y1.1 | length 10
  顶层 w0.16: IC1.9@31.243,8.211 32.29,7.164 v2(32.29,7) ; 31.798,7.656 cw(c31.143,7) v2@32.07,7 ; Y1.1@32.045,6.595 ccw(c31.834,7) v2(32.29,7) ; 32.072,7.382 cw(c31.689,7) v2@32.23,7 ; Y1.1@32.119,6.454 ccw(c31.972,6.736) v2@32.29,6.736 ; v2@32.157,6.825 cw(c31.955,6.557) Y1.1@32.29,6.557 ; v2@32.423,6.825 ccw(c32.625,6.557) Y1.1@32.29,6.557 ; Y1.1@32.447,6.401 Y1.1@32.29,6.557 ; Y1.1@32.29,6.557 v2(32.29,7)
  底层 w0.16: v2@32.247,6.784 cw(c32.182,6.463) 32.51,6.463 ; v2@32.278,6.941 cw(c32.221,6.658) 32.51,6.658 ; v2@32.385,6.801 cw(c32.432,6.702) 32.51,6.78 ; v2@32.489,6.905 ccw(c32.588,6.858) 32.51,6.78 ; C5.2@33.874,6.274 ccw(c33.327,5.727) 33.327,6.5 ccw(c33.327,7.273) C5.2@33.874,6.726 ; C5.2@34.1,6.5 32.52,6.5 32.51,6.51 ; 32.51,6.51 32.29,6.73 v2(32.29,7) 32.51,6.78 ; 32.51,6.51 32.51,6.78
PC15: C6.2 IC1.10 Y1.2 | length 12.1
  顶层 w0.16: IC1.10@31.596,8.565 33.41,6.751 33.41,5.988 32.51,5.088 ; Y1.2@32.566,5.291 cw(c32.442,5.221) 32.543,5.12 cw(c32.696,4.967) Y1.2@32.726,5.182 ; Y1.2@32.757,5.62 ccw(c32.757,6.308) 33.243,5.821 ; Y1.2@32.977,5.4 cw(c33.351,5.4) 33.086,5.664 ; Y1.2@32.457,5.263 v2(32.94,4.78) Y1.2@32.457,5.263 ; Y1.2@32.457,5.263 Y1.2@32.457,5.4 Y1.2@32.457,5.263 ; Y1.2@32.564,5.156 ccw(c32.94,5.531) 32.94,5 cw(c32.94,5.531) Y1.2@32.564,5.156 ; Y1.2@32.564,5.156 cw(c32.189,4.78) 32.72,4.78 ccw(c32.189,4.78) Y1.2@32.564,5.156
  底层 w0.16: v2(32.94,4.78) 33.23,4.78 33.538,5.088 ; v2@32.963,4.836 ccw(c33.103,5.181) 33.367,4.917 ; v2@33.023,4.984 ccw(c33.202,5.423) 33.538,5.088 ; C6.2@33.825,4.924 ccw(c33.538,4.753) 33.538,5.088 ; C6.2@33.825,5.251 cw(c33.538,5.422) 33.538,5.088 ; C6.2@34.1,5.088 33.538,5.088
PD0: IC1.142 JP1.6 | length 28.8
  顶层 w0.16: IC1.142@13.565,17.404 14.231,18.07 14.43,18.07 14.64,18.07 14.9,18.07 15.46,18.07 16.15,17.38 v1(16.31,17.38) ; 15.576,17.954 ccw(c16.31,18.688) v1@16.31,17.65 ; 15.849,17.681 ccw(c16.31,18.142) v1@16.31,17.49 ; 15.962,17.568 cw(c15.774,17.38) v1@16.04,17.38
  底层 w0.16: JP1.6@5,5.11 JP1.6@5,5 5,5.2 5.65,5.85 ; JP1.6@5,5.52 ccw(c5,6.293) 5.546,5.746 ; JP1.6@5.301,5.123 cw(c5.842,5.255) 5.449,5.649 ; JP1.6@5.457,5.161 cw(c6.166,5.334) 5.65,5.85 ; v1@16.108,17.201 ccw(c15.71,16.848) 15.71,17.38 ; v1@16.108,17.559 cw(c15.71,17.912) 15.71,17.38 ; v1(16.31,17.38) 15.71,17.38 ; 5.65,5.85 5.79,5.99 11.97,5.99 12.27,6.29 12.27,6.37 12.27,13.94 13.565,15.235 15.71,17.38
PD1: IC1.143 JP2.5 | length 23.2
  顶层 w0.16: JP2.5@5,3 5.84,3.84 ; JP2.5@5.013,3.36 ccw(c5.044,4.12) 5.582,3.582 ; JP2.5@5.019,3.52 ccw(c5.064,4.616) 5.84,3.84 ; JP2.5@5.31,3.05 cw(c5.938,3.05) 5.494,3.494 ; JP2.5@5.47,3.05 cw(c6.484,3.05) 5.767,3.767 ; IC1.143@13.919,17.05 11.73,14.862 11.73,11.82 11.49,11.58 6.93,11.58 6.4,11.05 6.4,8.71 5.84,8.15 5.84,3.84
PD2: IC1.144 JP2.6 | length 25.2
  顶层 w0.16: JP2.6@5,1 6.16,2.16 6.16,8 6.87,8.71 6.87,11.04 7.07,11.24 11.69,11.24 12.05,11.6 12.05,14.475 IC1.144@14.272,16.697 ; JP2.6@5,1.36 ccw(c5,2.229) 5.615,1.615 ; JP2.6@5,1.52 ccw(c5,2.775) 5.888,1.888 ; JP2.6@5.31,1.05 cw(c5.938,1.05) 5.494,1.494 ; JP2.6@5.47,1.05 cw(c6.484,1.05) 5.767,1.767
PD3: IC1.145 JP1.7 | length 16.7
  顶层 w0.16: JP1.7@6.706,7.417 ccw(c6.213,8.03) 7,8.03 ; JP1.7@6.806,7.292 ccw(c6.481,7.696) 7,7.696 ccw(c7.519,7.696) JP1.7@7.194,7.292 ; JP1.7@7,7 7,8.03 ; JP1.7@7.294,7.417 cw(c7.787,8.03) 7,8.03 ; IC1.145@14.626,16.343 12.37,14.088 12.37,10.23 10.63,8.49 7.46,8.49 7,8.03
PD4: IC1.146 JP1.8 | length 23.7
  顶层 w0.16: v1@13.201,14.191 ccw(c13.178,14.28) 13.27,14.28 ; v1@13.22,13.93 cw(c13.945,13.93) 13.432,14.443 ; v1(13.27,13.93) 13.27,14.28 ; v1@13.339,14.191 cw(c13.362,14.28) 13.27,14.28 ; v1@13.38,13.93 cw(c14.492,13.93) 13.706,14.716 ; v1@13.54,13.93 cw(c15.038,13.93) 13.979,14.989 ; IC1.146@14.979,15.99 13.27,14.28
  底层 w0.16: JP1.8@6.81,4.88 6.81,4.77 7.55,4.03 11.85,4.03 12.61,4.79 12.61,13.27 v1(13.27,13.93) ; JP1.8@7,4.48 cw(c7,4.239) 7.171,4.409 ; JP1.8@7.232,4.745 ccw(c7.456,4.547) 7.245,4.335 ; JP1.8@7.352,4.639 ccw(c7.584,4.434) 7.365,4.215 ; v1@13,13.93 cw(c12.348,13.93) 12.809,13.469 cw(c13.27,13.008) v1@13.27,13.66
PD5: IC1.147 JP2.7 | length 20.2
  顶层 w0.16: JP2.7@7,3 7.84,3.84 ; JP2.7@7.013,3.36 ccw(c7.044,4.12) 7.582,3.582 ; JP2.7@7.019,3.52 ccw(c7.064,4.616) 7.84,3.84 ; JP2.7@7.31,3.05 cw(c7.938,3.05) 7.494,3.494 ; JP2.7@7.47,3.05 cw(c8.484,3.05) 7.767,3.767 ; IC1.147@15.333,15.636 14.72,15.023 14.72,14.47 12.8,12.55 12.8,10.208 10.762,8.17 8.51,8.17 7.84,7.5 7.84,3.84
PD6: IC1.150 JP2.8 | length 21.7
  顶层 w0.16: JP2.8@7,1 8.16,2.16 8.16,7.36 8.65,7.85 10.895,7.85 15.67,12.625 15.67,13.852 IC1.150@16.393,14.575 ; JP2.8@7,1.36 ccw(c7,2.229) 7.615,1.615 ; JP2.8@7,1.52 ccw(c7,2.775) 7.888,1.888 ; JP2.8@7.31,1.05 cw(c7.938,1.05) 7.494,1.494 ; JP2.8@7.47,1.05 cw(c8.484,1.05) 7.767,1.767
PD7: IC1.151 JP1.9 | length 14.3
  顶层 w0.16: JP1.9@9,7 10.497,7 15.99,12.492 15.99,13.464 IC1.151@16.747,14.222 ; JP1.9@9.219,6.781 cw(c9.748,6.252) 9.748,7 cw(c9.748,7.748) JP1.9@9.219,7.219 ; JP1.9@9.332,6.668 cw(c10.135,5.865) 10.135,7 cw(c10.135,8.135) JP1.9@9.332,7.332
PD8: IC1.96 JP5.19 | length 12
  顶层 w0.16: JP5.19@19,42.48 cw(c19,41.225) 19.888,42.112 ; JP5.19@19,42.64 cw(c19,41.771) 19.615,42.385 ; JP5.19@19,43 19.99,42.01 19.99,39.263 22.429,36.824 IC1.96@23.464,35.789 ; JP5.19@19.31,42.95 ccw(c19.938,42.95) 19.494,42.506 ; JP5.19@19.47,42.95 ccw(c20.484,42.95) 19.767,42.233
PD9: IC1.97 JP5.20 | length 9.2
  顶层 w0.16: JP5.20@18.733,40.563 cw(c18.383,40.055) 19,40.055 ; JP5.20@18.824,40.695 cw(c18.593,40.36) 19,40.36 cw(c19.407,40.36) JP5.20@19.176,40.695 ; JP5.20@19,41 19,40.055 ; JP5.20@19.267,40.563 ccw(c19.617,40.055) 19,40.055 ; IC1.97@23.111,35.435 22.1,36.446 19,39.546 19,40.055
PD10: IC1.98 JP5.17 | length 13.3
  顶层 w0.16: JP5.17@17,42.48 cw(c17,41.225) 17.888,42.112 ; JP5.17@17,42.64 cw(c17,41.771) 17.615,42.385 ; JP5.17@17,43 17.99,42.01 17.99,40.613 17.99,39.849 21.78,36.059 IC1.98@22.757,35.081 ; JP5.17@17.31,42.95 ccw(c17.938,42.95) 17.494,42.506 ; JP5.17@17.47,42.95 ccw(c18.484,42.95) 17.767,42.233
PD11: IC1.99 JP5.18 | length 9.3
  顶层 w0.16: JP5.18@17,41 17.522,40.478 17.522,39.61 21.45,35.682 IC1.99@22.404,34.728 ; JP5.18@17.19,40.52 cw(c17.32,40.226) 17.547,40.453 cw(c17.811,40.717) JP5.18@17.452,40.82
PD12: IC1.100 JP5.15 | length 14.9
  顶层 w0.16: JP5.15@15,42.48 cw(c15,41.225) 15.888,42.112 ; JP5.15@15,42.64 cw(c15,41.771) 15.615,42.385 ; JP5.15@15,43 16.01,41.99 16.01,40.669 ; JP5.15@15.31,42.95 ccw(c15.938,42.95) 15.494,42.506 ; JP5.15@15.47,42.95 ccw(c16.484,42.95) 15.767,42.233 ; 16.01,41.03 16.01,40.415 17.195,39.23 21.13,35.295 IC1.100@22.05,34.374
PD13: IC1.101 JP5.16 | length 13.3
  顶层 w0.16: JP5.16@15,40.48 cw(c15,39.907) 15.405,40.312 ; JP5.16@15,41 15,40.718 20.81,34.908 IC1.101@21.697,34.021 ; JP5.16@15.15,40.95 ccw(c16.073,40.95) 15.42,40.297 ; JP5.16@15.31,40.95 ccw(c16.62,40.95) 15.694,40.024 ; JP5.16@15.47,40.95 ccw(c17.166,40.95) 15.967,39.751
PD14: IC1.104 JP5.13 | length 16.2
  顶层 w0.16: JP5.13@13,42.48 cw(c13,41.225) 13.888,42.112 ; JP5.13@13,42.64 cw(c13,41.771) 13.615,42.385 ; JP5.13@13,43 14.02,41.98 14.02,39.576 19.556,34.04 IC1.104@20.636,32.96 ; JP5.13@13.31,42.95 ccw(c13.938,42.95) 13.494,42.506 ; JP5.13@13.47,42.95 ccw(c14.484,42.95) 13.767,42.233
PD15: IC1.105 JP5.14 | length 14.1
  顶层 w0.16: JP5.14@12.684,40.602 cw(c12.038,39.889) 13,39.889 ; JP5.14@12.792,40.72 cw(c12.365,40.25) 13,40.25 cw(c13.635,40.25) JP5.14@13.208,40.72 ; JP5.14@13,41 13,39.889 ; JP5.14@13.316,40.602 ccw(c13.962,39.889) 13,39.889 ; IC1.105@20.282,32.607 19.169,33.72 13,39.889
PE0: IC1.169 JP2.22 | length 10.7
  顶层 w0.16: JP2.22@21,1 21.98,1.98 21.98,6.727 IC1.169@23.111,7.858 ; JP2.22@21,1.36 ccw(c21,2.229) 21.615,1.615 ; JP2.22@21,1.52 ccw(c21,2.775) 21.888,1.888 ; JP2.22@21.31,1.05 cw(c21.938,1.05) 21.494,1.494 ; JP2.22@21.47,1.05 cw(c22.484,1.05) 21.767,1.767
PE1: IC1.170 JP2.23 | length 6.1
  顶层 w0.16: JP2.23@22.543,3.159 ccw(c22.112,3.262) 22.425,3.575 ccw(c22.695,3.844) JP2.23@22.831,3.489 ; JP2.23@23,3 22.4,3.6 22.4,6.44 23,7.04 IC1.170@23.464,7.504
PE2: IC1.1 JP2.27 | length 5
  顶层 w0.16: JP2.27@26.725,3.431 ccw(c26.337,3.969) 27,3.969 ; JP2.27@26.819,3.301 ccw(c26.563,3.656) 27,3.656 ccw(c27.437,3.656) JP2.27@27.181,3.301 ; JP2.27@27,3 27,3.969 ; JP2.27@27.275,3.431 cw(c27.663,3.969) 27,3.969 ; IC1.1@28.414,5.383 27,3.969
PE3: IC1.2 JP2.30 | length 8.8
  顶层 w0.16: 28.112,1.888 ccw(c29,2.775) JP2.30@29,1.52 ; 28.233,1.767 cw(c27.516,1.05) JP2.30@28.53,1.05 ; 28.385,1.615 ccw(c29,2.229) JP2.30@29,1.36 ; 28.506,1.494 cw(c28.062,1.05) JP2.30@28.69,1.05 ; IC1.2@28.768,5.737 29.28,5.224 29.28,4.89 28.01,3.62 28.01,1.99 JP2.30@29,1
PE4: IC1.3 JP2.29 | length 6.8
  顶层 w0.16: JP2.29@29,3 29.99,3.99 29.99,5.221 IC1.3@29.121,6.09 ; JP2.29@29,3.36 ccw(c29,4.229) 29.615,3.615 ; JP2.29@29,3.52 ccw(c29,4.775) 29.888,3.888 ; JP2.29@29.31,3.05 cw(c29.938,3.05) 29.494,3.494 ; JP2.29@29.47,3.05 cw(c30.484,3.05) 29.767,3.767
PE5: IC1.4 JP2.32 | length 9.5
  顶层 w0.16: IC1.4@29.475,6.444 30.6,5.319 30.6,4.147 30.06,3.607 30.06,1.94 JP2.32@31,1 ; 30.112,1.888 ccw(c31,2.775) JP2.32@31,1.52 ; 30.233,1.767 cw(c29.516,1.05) JP2.32@30.53,1.05 ; 30.385,1.615 ccw(c31,2.229) JP2.32@31,1.36 ; 30.506,1.494 cw(c30.062,1.05) JP2.32@30.69,1.05
PE6: IC1.5 JP2.31 | length 7.2
  顶层 w0.16: IC1.5@29.828,6.797 30.94,5.686 30.94,4.38 31,4.32 JP2.31@31,3 ; JP2.31@30.668,3.382 ccw(c29.865,4.185) 31,4.185 ccw(c32.135,4.185) JP2.31@31.332,3.382 ; JP2.31@30.781,3.269 ccw(c30.252,3.798) 31,3.798 ccw(c31.748,3.798) JP2.31@31.219,3.269
PE7: IC1.68 JP5.42 | length 14.7
  顶层 w0.16: IC1.68@35.485,31.546 36.35,32.411 36.35,33.255 39.64,36.545 39.64,39.64 JP5.42@41,41 ; 40.112,40.112 cw(c41,39.225) JP5.42@41,40.48 ; 40.233,40.233 ccw(c39.516,40.95) JP5.42@40.53,40.95 ; 40.385,40.385 cw(c41,39.771) JP5.42@41,40.64 ; 40.506,40.506 ccw(c40.062,40.95) JP5.42@40.69,40.95
PE8: IC1.69 JP5.41 | length 16.5
  顶层 w0.16: IC1.69@35.132,31.899 36.021,32.789 36.021,33.379 39.32,36.678 39.32,39.773 39.84,40.293 39.84,41.84 JP5.41@41,43 ; 40.112,42.112 cw(c41,41.225) JP5.41@41,42.48 ; 40.233,42.233 ccw(c39.516,42.95) JP5.41@40.53,42.95 ; 40.385,42.385 cw(c41,41.771) JP5.41@41,42.64 ; 40.506,42.506 ccw(c40.062,42.95) JP5.41@40.69,42.95
PE9: IC1.70 JP5.40 | length 13.5
  顶层 w0.16: IC1.70@34.778,32.253 35.701,33.176 35.701,33.511 39,36.81 JP5.40@39,41 ; JP5.40@38.668,40.618 cw(c37.865,39.815) 39,39.815 cw(c40.135,39.815) JP5.40@39.332,40.618 ; JP5.40@38.781,40.731 cw(c38.252,40.202) 39,40.202 cw(c39.748,40.202) JP5.40@39.219,40.731
PE10: IC1.73 JP5.39 | length 14.8
  顶层 w0.16: IC1.73@33.718,33.314 35.31,34.906 35.31,37.74 38.03,40.46 38.03,42.03 JP5.39@39,43 ; 38.112,42.112 cw(c39,41.225) JP5.39@39,42.48 ; 38.233,42.233 ccw(c37.516,42.95) JP5.39@38.53,42.95 ; 38.385,42.385 cw(c39,41.771) JP5.39@39,42.64 ; 38.506,42.506 ccw(c38.062,42.95) JP5.39@38.69,42.95
PE11: IC1.74 JP5.38 | length 11.4
  顶层 w0.16: IC1.74@33.364,33.667 34.99,35.293 34.99,37.9 37,39.91 ; JP5.38@36.689,40.597 cw(c36.084,39.91) 37,39.91 ; JP5.38@36.795,40.717 cw(c36.396,40.264) 37,40.264 cw(c37.604,40.264) JP5.38@37.205,40.717 ; JP5.38@37,41 37,39.91 ; JP5.38@37.311,40.597 ccw(c37.916,39.91) 37,39.91
PE12: IC1.75 JP5.37 | length 13.6
  顶层 w0.16: IC1.75@33.01,34.021 34.67,35.68 34.67,38.06 36.01,39.4 36.01,42.01 JP5.37@37,43 ; 36.112,42.112 cw(c37,41.225) JP5.37@37,42.48 ; 36.233,42.233 ccw(c35.516,42.95) JP5.37@36.53,42.95 ; 36.385,42.385 cw(c37,41.771) JP5.37@37,42.64 ; 36.506,42.506 ccw(c36.062,42.95) JP5.37@36.69,42.95
PE13: IC1.76 JP5.36 | length 7.6
  顶层 w0.16: IC1.76@32.657,34.374 34.35,36.068 34.35,40.35 JP5.36@35,41
PE14: IC1.77 JP5.35 | length 12.3
  顶层 w0.16: IC1.77@32.303,34.728 34.03,36.455 34.03,42.03 JP5.35@35,43 ; 34.112,42.112 cw(c35,41.225) JP5.35@35,42.48 ; 34.233,42.233 ccw(c33.516,42.95) JP5.35@34.53,42.95 ; 34.385,42.385 cw(c35,41.771) JP5.35@35,42.64 ; 34.506,42.506 ccw(c34.062,42.95) JP5.35@34.69,42.95
PE15: IC1.78 JP5.34 | length 9.3
  顶层 w0.16: IC1.78@31.95,35.081 33,36.132 JP5.34@33,41 ; JP5.34@32.668,40.618 cw(c31.865,39.815) 33,39.815 cw(c34.135,39.815) JP5.34@33.332,40.618 ; JP5.34@32.781,40.731 cw(c32.252,40.202) 33,40.202 cw(c33.748,40.202) JP5.34@33.219,40.731
PF0: IC1.16 JP2.37 | length 12
  顶层 w0.16: IC1.16@33.718,10.686 35.96,8.444 35.96,4.04 JP2.37@37,3 ; 36.112,3.888 ccw(c37,4.775) JP2.37@37,3.52 ; 36.233,3.767 cw(c35.516,3.05) JP2.37@36.53,3.05 ; 36.385,3.615 ccw(c37,4.229) JP2.37@37,3.36 ; 36.506,3.494 cw(c36.062,3.05) JP2.37@36.69,3.05
PF1: IC1.17 JP2.40 | length 15.5
  顶层 w0.16: IC1.17@34.071,11.04 36.28,8.831 36.28,4.3 36.68,3.9 37.5,3.9 38.01,3.39 38.01,1.99 JP2.40@39,1 ; 38.112,1.888 ccw(c39,2.775) JP2.40@39,1.52 ; 38.233,1.767 cw(c37.516,1.05) JP2.40@38.53,1.05 ; 38.385,1.615 ccw(c39,2.229) JP2.40@39,1.36 ; 38.506,1.494 cw(c38.062,1.05) JP2.40@38.69,1.05
PF2: IC1.18 JP2.39 | length 13.7
  顶层 w0.16: IC1.18@34.425,11.393 36.68,9.138 36.68,4.54 36.98,4.24 37.76,4.24 JP2.39@39,3 ; 38.112,3.888 ccw(c39,4.775) JP2.39@39,3.52 ; 38.233,3.767 cw(c37.516,3.05) JP2.39@38.53,3.05 ; 38.385,3.615 ccw(c39,4.229) JP2.39@39,3.36 ; 38.506,3.494 cw(c38.062,3.05) JP2.39@38.69,3.05
PF3: IC1.19 JP2.42 | length 17.1
  顶层 w0.16: IC1.19@34.778,11.747 35.66,10.865 35.66,10.611 37,9.271 37,8.103 37.873,7.23 39.34,7.23 39.51,7.06 39.51,3.89 39.84,3.56 39.84,2.16 JP2.42@41,1 ; 40.112,1.888 ccw(c41,2.775) JP2.42@41,1.52 ; 40.233,1.767 cw(c39.516,1.05) JP2.42@40.53,1.05 ; 40.385,1.615 ccw(c41,2.229) JP2.42@41,1.36 ; 40.506,1.494 cw(c40.062,1.05) JP2.42@40.69,1.05
PF4: IC1.20 JP2.41 | length 15.4
  顶层 w0.16: IC1.20@35.132,12.101 36.09,11.142 36.09,10.633 37.32,9.403 37.32,8.235 38.005,7.55 39.5,7.55 39.84,7.21 39.84,4.16 JP2.41@41,3 ; 40.112,3.888 ccw(c41,4.775) JP2.41@41,3.52 ; 40.233,3.767 cw(c39.516,3.05) JP2.41@40.53,3.05 ; 40.385,3.615 ccw(c41,4.229) JP2.41@41,3.36 ; 40.506,3.494 cw(c40.062,3.05) JP2.41@40.69,3.05
PF5: IC1.21 JP3.2 | length 13.4
  顶层 w0.16: IC1.21@35.485,12.454 36.42,11.519 36.42,10.756 37.64,9.536 37.64,8.368 38.138,7.87 39.65,7.87 40.16,7.36 40.16,5.84 JP3.2@41,5 ; 40.185,5.815 ccw(c40.905,6.534) JP3.2@40.97,5.519 ; 40.233,5.767 cw(c39.516,5.05) JP3.2@40.53,5.05 ; 40.435,5.565 ccw(c40.935,6.064) JP3.2@40.98,5.359 ; 40.506,5.494 cw(c40.062,5.05) JP3.2@40.69,5.05
PF6: IC1.24 JP3.1 | length 11.3
  顶层 w0.16: IC1.24@36.546,13.515 38.561,11.5 41,9.061 JP3.1@41,7 ; JP3.1@40.668,7.382 ccw(c39.865,8.185) 41,8.185 ccw(c42.135,8.185) JP3.1@41.332,7.382 ; JP3.1@40.781,7.269 ccw(c40.252,7.798) 41,7.798 ccw(c41.748,7.798) JP3.1@41.219,7.269
PF7: IC1.25 JP2.44 | length 18.4
  顶层 w0.16: IC1.25@36.899,13.868 41.81,8.958 41.81,2.19 41.84,2.16 JP2.44@43,1 ; 42.112,1.888 ccw(c43,2.775) JP2.44@43,1.52 ; 42.233,1.767 cw(c41.516,1.05) JP2.44@42.53,1.05 ; 42.385,1.615 ccw(c43,2.229) JP2.44@43,1.36 ; 42.506,1.494 cw(c42.062,1.05) JP2.44@42.69,1.05
PF8: IC1.26 JP2.43 | length 16.4
  顶层 w0.16: IC1.26@37.253,14.222 42.16,9.315 42.16,3.84 JP2.43@43,3 ; 42.185,3.815 ccw(c42.905,4.534) JP2.43@42.97,3.519 ; 42.233,3.767 cw(c41.516,3.05) JP2.43@42.53,3.05 ; 42.435,3.565 ccw(c42.935,4.064) JP2.43@42.98,3.359 ; 42.506,3.494 cw(c42.062,3.05) JP2.43@42.69,3.05
PF9: IC1.27 JP3.4 | length 16.6
  顶层 w0.16: IC1.27@37.607,14.575 38.652,13.53 ; v1@38.998,13.362 ccw(c38.652,13.088) 38.652,13.53 ; v1@38.998,13.698 cw(c38.652,13.972) 38.652,13.53 ; v1(39.21,13.53) 38.652,13.53
  底层 w0.16: v1@39.21,13.26 cw(c39.21,12.608) 39.671,13.069 cw(c40.132,13.53) v1@39.48,13.53 ; v1(39.21,13.53) 41.97,10.77 41.97,10.01 ; 41.97,10.212 41.97,5.8 42.77,5 JP3.4@43,5 ; 42.11,5.66 ccw(c42.609,6.159) JP3.4@42.844,5.493 ; 42.29,5.48 ccw(c42.703,5.894) JP3.4@42.897,5.342 ; 42.396,5.374 cw(c42.071,5.05) JP3.4@42.53,5.05 ; 42.469,5.301 ccw(c42.796,5.628) JP3.4@42.95,5.191
PF10: IC1.28 JP3.3 | length 13.5
  顶层 w0.16: IC1.28@37.96,14.929 38.419,14.47 38.689,14.2 39.53,14.2 39.96,13.77 39.96,12.929 39.96,11.967 43,8.927 JP3.3@43,7 ; JP3.3@42.668,7.382 ccw(c41.865,8.185) 43,8.185 ccw(c44.135,8.185) JP3.3@43.332,7.382 ; JP3.3@42.781,7.269 ccw(c42.252,7.798) 43,7.798 ccw(c43.748,7.798) JP3.3@43.219,7.269
PF11: IC1.59 JP5.45 | length 20.2
  顶层 w0.16: IC1.59@38.667,28.364 43.84,33.537 43.84,41.84 JP5.45@45,43 ; 44.112,42.112 cw(c45,41.225) JP5.45@45,42.48 ; 44.233,42.233 ccw(c43.516,42.95) JP5.45@44.53,42.95 ; 44.385,42.385 cw(c45,41.771) JP5.45@45,42.64 ; 44.506,42.506 ccw(c44.062,42.95) JP5.45@44.69,42.95
PF12: IC1.60 JP6.4 | length 13.2
  顶层 w0.16: IC1.60@38.314,28.718 43,33.404 JP6.4@43,37 ; JP6.4@42.668,36.618 cw(c41.865,35.815) 43,35.815 cw(c44.135,35.815) JP6.4@43.332,36.618 ; JP6.4@42.781,36.731 cw(c42.252,36.202) 43,36.202 cw(c43.748,36.202) JP6.4@43.219,36.731
PF13: IC1.63 JP6.3 | length 17.6
  顶层 w0.16: IC1.63@37.253,29.778 39.29,31.815 39.29,32.59 v1(41.87,35.17) ; v1@41.6,35.17 cw(c40.948,35.17) 41.409,34.709 cw(c41.87,34.248) v1@41.87,34.9
  底层 w0.16: v1@41.679,35.361 ccw(c40.518,36.522) 42.16,36.522 ; v1@41.792,35.248 ccw(c40.904,36.136) 42.16,36.136 ; v1(41.87,35.17) 42.16,35.46 ; v1@41.905,35.135 ccw(c41.291,35.749) 42.16,35.749 ; v1@41.97,35.421 ccw(c42.035,35.585) 42.16,35.46 ; v1@42.121,35.27 cw(c42.285,35.335) 42.16,35.46 ; 42.252,38.682 cw(c42.692,38.242) JP6.3@42.94,38.812 ; 42.418,38.848 cw(c42.793,38.474) JP6.3@43.004,38.959 ; JP6.3@43,39 42.57,39 42.16,38.59 42.16,35.46
PF14: IC1.64 JP5.44 | length 13.9
  顶层 w0.16: IC1.64@36.899,30.132 37.67,30.902 37.67,32.765 40.415,35.51 41.25,35.51 42.16,36.42 42.16,40.16 JP5.44@43,41
PF15: IC1.65 JP5.43 | length 18.6
  顶层 w0.16: IC1.65@36.546,30.485 37.35,31.289 37.35,32.897 40.283,35.83 41.11,35.83 41.84,36.56 41.84,41.84 JP5.43@43,43 ; 42.112,42.112 cw(c43,41.225) JP5.43@43,42.48 ; 42.233,42.233 ccw(c41.516,42.95) JP5.43@42.53,42.95 ; 42.385,42.385 cw(c43,41.771) JP5.43@43,42.64 ; 42.506,42.506 ccw(c42.062,42.95) JP5.43@42.69,42.95
PG0: IC1.66 JP6.2 | length 11.1
  顶层 w0.16: IC1.66@36.192,30.839 37.03,31.676 37.03,33.03 JP6.2@41,37 ; 40.112,36.112 cw(c41,35.225) JP6.2@41,36.48 ; 40.233,36.233 ccw(c39.516,36.95) JP6.2@40.53,36.95 ; 40.385,36.385 cw(c41,35.771) JP6.2@41,36.64 ; 40.506,36.506 ccw(c40.062,36.95) JP6.2@40.69,36.95
PG1: IC1.67 JP6.1 | length 12.9
  顶层 w0.16: IC1.67@35.839,31.192 36.67,32.024 36.67,33.123 39.96,36.413 39.96,37.96 JP6.1@41,39 ; 40.112,38.112 cw(c41,37.225) JP6.1@41,38.48 ; 40.233,38.233 ccw(c39.516,38.95) JP6.1@40.53,38.95 ; 40.385,38.385 cw(c41,37.771) JP6.1@41,38.64 ; 40.506,38.506 ccw(c40.062,38.95) JP6.1@40.69,38.95
PG2: IC1.106 JP5.11 | length 17.4
  顶层 w0.16: JP5.11@11,42.48 cw(c11,41.225) 11.888,42.112 ; JP5.11@11,42.64 cw(c11,41.771) 11.615,42.385 ; JP5.11@11,43 11.99,42.01 11.99,40.192 18.782,33.4 IC1.106@19.929,32.253 ; JP5.11@11.31,42.95 ccw(c11.938,42.95) 11.494,42.506 ; JP5.11@11.47,42.95 ccw(c12.484,42.95) 11.767,42.233
PG3: IC1.107 JP5.12 | length 14.5
  顶层 w0.16: JP5.12@11,41 11,40.475 11.65,39.825 IC1.107@19.575,31.899 ; JP5.12@11.119,40.859 ccw(c11.444,40.61) 11.154,40.321 ; JP5.12@11.246,40.761 ccw(c11.59,40.498) 11.283,40.191 ; JP5.12@11.373,40.664 ccw(c11.736,40.386) 11.412,40.062
PG4: IC1.108 JP5.9 | length 18.6
  顶层 w0.16: JP5.9@9,42.48 cw(c9,41.225) 9.888,42.112 ; JP5.9@9,42.64 cw(c9,41.771) 9.615,42.385 ; JP5.9@9,43 10.08,41.92 10.1,41.9 10.1,40.668 11.128,39.64 18.073,32.695 IC1.108@19.222,31.546 ; JP5.9@9.31,42.95 ccw(c9.938,42.95) 9.494,42.506 ; JP5.9@9.47,42.95 ccw(c10.484,42.95) 9.767,42.233
PG5: IC1.109 JP5.10 | length 17.4
  顶层 w0.16: JP5.10@9,40.48 cw(c9,39.078) 9.991,40.069 ; JP5.10@9,40.64 cw(c9,39.624) 9.718,40.343 ; JP5.10@9,40.8 cw(c9,40.171) 9.445,40.616 ; JP5.10@9,41 9.061,41 10.741,39.32 17.753,32.308 IC1.109@18.868,31.192 ; JP5.10@9.31,40.95 ccw(c9.791,40.95) 9.451,40.61 ; JP5.10@9.47,40.95 ccw(c10.338,40.95) 9.724,40.337